# Altium PCB PCB2.PcbDoc
Units mm, origin at the board's own origin, x right, y up, seen from the top; angles counter-clockwise.
Board outline 82.42 x 32.77 mm, 2 copper layers (Top Layer, Bottom Layer); 42 components, 37 nets, 162 pads, 35 vias.
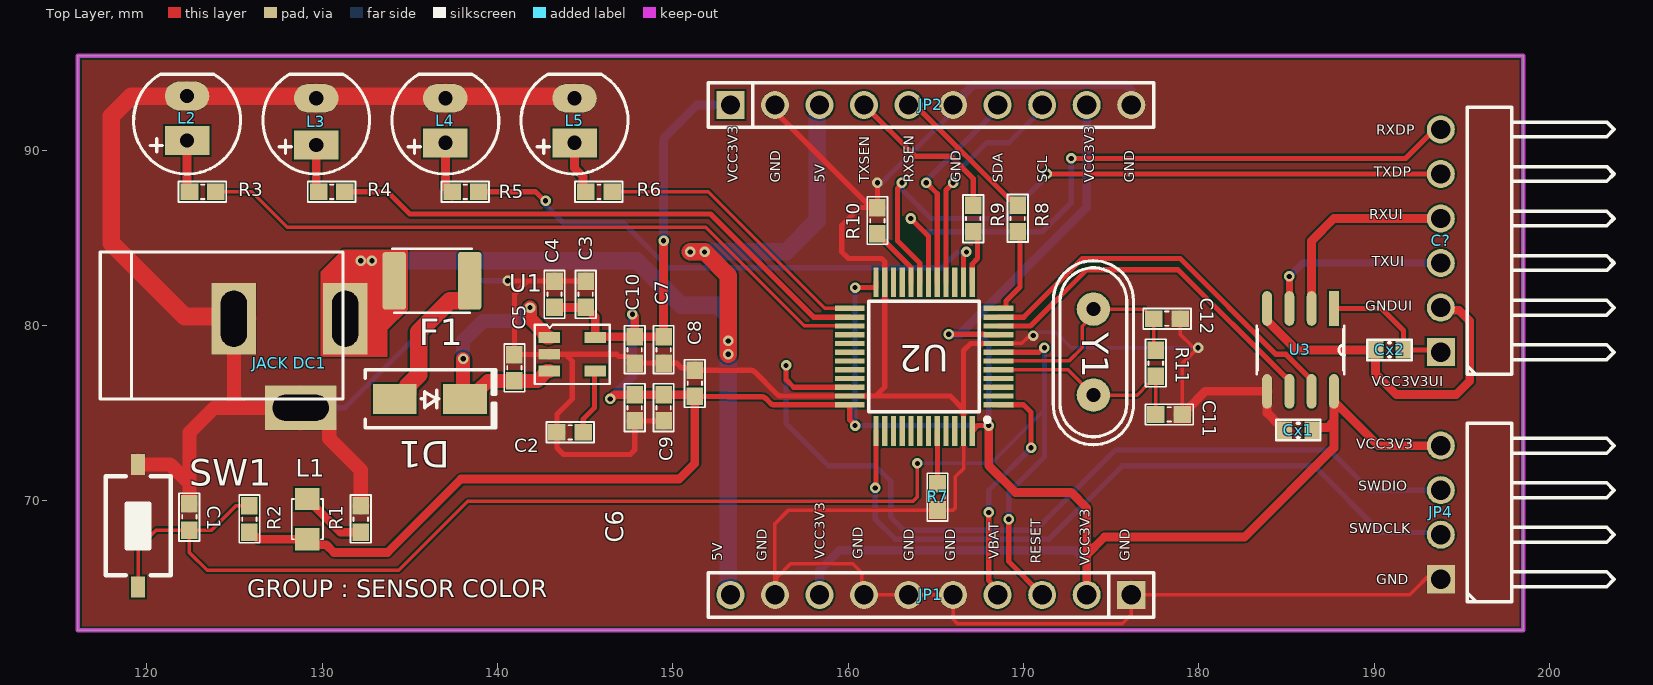
[diagram p0: Top Layer view]
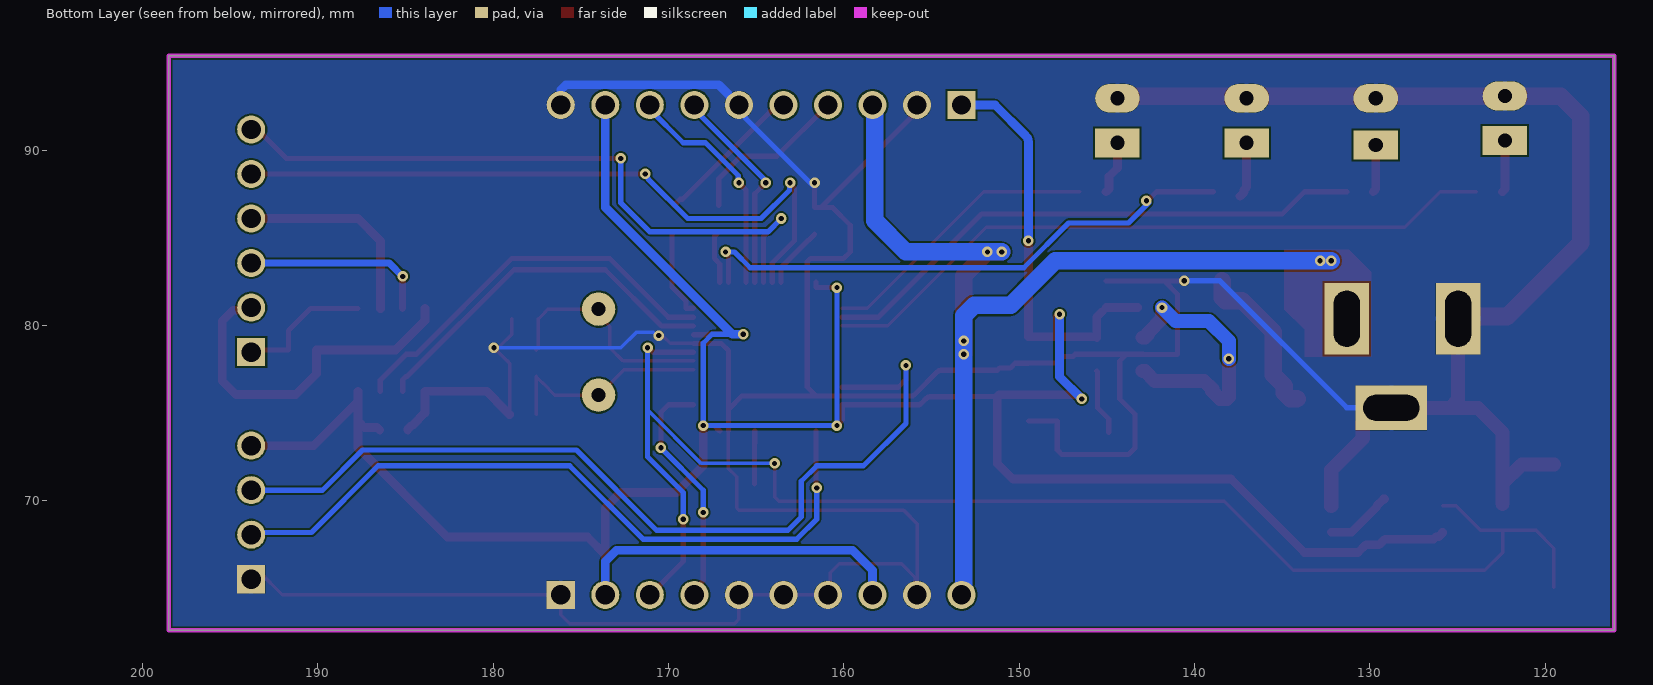
[diagram p1: Bottom Layer view, seen from below]
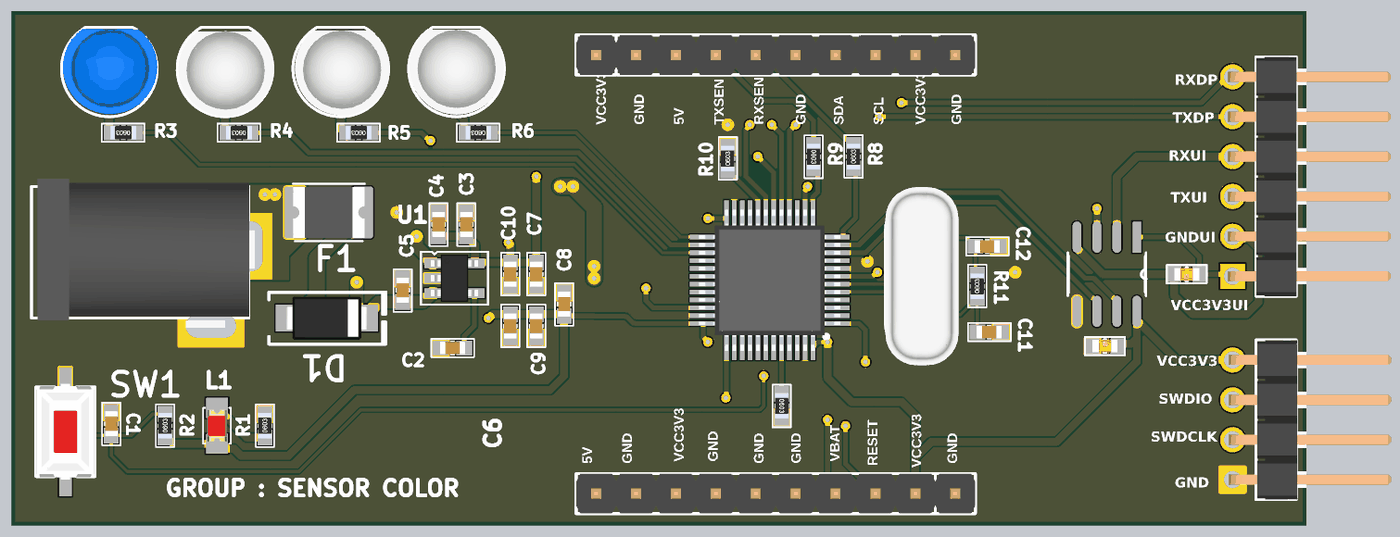
[diagram p2: 3D render of the assembled board from above, using the file's embedded part models]

## Layer stack, top to bottom
Top Solder: solder mask 0.0102, Solder Resist, Dk 3.5
Top Layer: signal copper 0.0356
Dielectric 1: dielectric 0.32, FR-4, Dk 4.8
Bottom Layer: signal copper 0.0356
Bottom Solder: solder mask 0.0102, Solder Resist, Dk 3.5

## Board outline
116.078,62.611 116.078,95.377 198.501,95.377 198.501,62.611

## Design rules (kind name [scope] priority, off if disabled: settings)
Clearance [All] p1: gap=0.1 ignorepadtopadclearanceinfootprint=FALSE
PolygonConnect [All] p1: connectstyle=Relief reliefconductorwidth=0.254 reliefentries=4 polygonreliefangle="90 Angle" airgapwidth=0
RoutingVias [All] p1: holewidth=0.3 width=0.6 viastyle="Through Hole" minholewidth=0.3 minwidth=0.6 maxholewidth=0.3 maxwidth=0.6
SolderMaskExpansion [All] p1: expansion=0.102 istentingtop=FALSE
Width [All] p1: maxlimit=1 minlimit=0.2 preferedwidth=0.5
30 further rules are at their usual default settings.

## Components (designator, comment, footprint, x,y, rotation, side; value= is the part's Value field where it differs from the comment)
C1 "105,0603" "tu 0603" 122.428,69.088 r270 top
C2 "223,0603" "tu 0603" 144.145,73.914 r0 top
C3 "106,0603" "tu 0603" 145.034,81.788 r270 top
C4 "104,0603" "tu 0603" 143.256,81.788 r270 top
C5 "105,0603" "tu 0603" 140.97,77.597 r270 top
C6 "104,0603" "tu 0603" 147.828,75.311 r90 top
C7 "104,0603" "tu 0603" 149.479,78.613 r90 top
C8 "104,0603" "tu 0603" 151.257,76.708 r270 top
C9 "104,0603" "tu 0603" 149.479,75.311 r90 top
C10 "104,0603" "tu 0603" 147.828,78.613 r90 top
C11 "20p,0603" "tu 0603" 178.308,74.93 r0 top
C12 "20p,0603" "tu 0603" 178.181,80.391 r0 top
C? "JP6" JP6-D1C 196.342,92.456 r90 top
Cx1 "104" CN-SMD-0603 185.674,74.041 r0 top value=33pF
Cx2 "104" CN-SMD-0603 190.881,78.613 r180 top value=33pF
D1 "SS14" "DIODE SMA" 136.144,75.819 r0 top
F1 "0.5A 24V" "Cau chi tu phuc hoi 2A 24V SMD1812" 136.271,82.55 r0 top
"JACK DC1" "JACK DC 5.5" "JACK DC 5.5" 128.143,77.851 r0 top value="Jac DC"
JP1 "JP 1x10 2.54" "JP 1x10 DT" 176.149,64.643 r180 top
JP2 "JP 1x10 2.54" "JP 1x10 DT" 153.289,92.583 r0 top
JP4 "JP 1x4 2.54" "JP 1x4 DC" 196.342,74.422 r90 top
L1 "LED 0805" LED-0805-Red 129.159,67.818 r90 top
L2 "LED 5mm" LED-5MM-BLUE 122.301,91.694 r90 top
L3 "LED 5mm" LED-5MM-Green 129.667,90.424 r90 top
L4 "LED 5mm" LED-5MM-Yellow 137.033,90.424 r90 top
L5 "LED 5mm" LED-5MM-RED 144.399,90.424 r90 top
R1 "510R,0603" "tro smd 0603" 132.207,68.961 r90 top
R2 "10k,0603" "tro smd 0603" 125.857,68.961 r90 top
R3 "220R,0603" "tro smd 0603" 123.19,87.63 r180 top
R4 "220R,0603" "tro smd 0603" 130.556,87.63 r180 top
R5 "220R,0603" "tro smd 0603" 138.176,87.63 r180 top
R6 "220R,0603" "tro smd 0603" 145.796,87.63 r180 top
R7 "10k,0603" "tro smd 0603" 165.1,70.231 r270 top
R8 "220R,0603" "tro smd 0603" 169.672,86.106 r90 top
R9 "220R,0603" "tro smd 0603" 167.132,86.106 r270 top
R10 "10k,0603" "tro smd 0603" 161.671,85.979 r90 top
R11 "1M" "tro smd 0603" 177.546,77.851 r90 top
SW1 "SW" SW1-SMD 119.507,68.58 r270 top value="SW chip 2 pin"
U1 "RT9193-33GB" SOT23-5 144.272,78.359 r270 top
U2 "STM32F103C8T6" LQFP-48_19.6_393_58X11_SMD 164.338,78.232 r180 top
U3 "ADUM1201ARZ" SOIC127P600X175-8N 185.801,78.613 r270 top
Y1 "8Mhz" "Thach Anh 2 chan cam" 173.99,78.486 r90 top value=4Mhz

## Footprints (in the part's own frame and the unit in brackets; to place one, negate y for a bottom-side part, rotate by r counter-clockwise, add the part's x,y. Pads: shape width x height; smd on the part's side, far side on the other; paste and mask are expansions set on the pad)
"Cau chi tu phuc hoi 2A 24V SMD1812" [mm]
  rrect25% 1.34x3.29 smd: 1(-2.15,0) 2(2.15,0)
  silkscreen extent -2.28,-1.83 2.28,1.83, body extent -2.27,-1.62 2.28,1.62, height 1.25
CN-SMD-0603 [mm]
  rect 0.9x1 smd: 1(-0.8,0) 2(0.8,0)
  silkscreen extent -1.27,-0.58 1.27,0.58, body extent -0.8,-0.4 0.8,0.4, height 0.3
"DIODE SMA" [mm] "SMA"
  rect 2.5x1.7 smd: 1(-2,0) 2(2,0)
  silkscreen extent -3.68,-1.65 3.75,1.65, body extent -2.6,-1.37 2.6,1.37, height 2.4
"JACK DC 5.5" [mm] "Jac DC input"
  rect 2.54x4.064 hole 1.5 slot 3.2 at 90 deg: 1(3.175,2.54) 2(-3.175,2.54)
  rect 4.064x2.54 hole 1.5 slot 3.2 at 0 deg: 3(0.635,-2.54)
  silkscreen extent -10.79,-2.03 3.05,6.35, body extent -10.42,-2.67 3.4,6.84, height 11.02
JP6-D1C [mm] "6 pins, 1 row, right angled, gold plating"
  rect 1.6x1.6 hole 1.1: 1(-13.97,2.54)
  round 1.6 hole 1.1: 2(-11.43,2.54) 3(-8.89,2.54) 4(-6.35,2.54) 5(-3.81,2.54) 6(-1.27,2.54)
  silkscreen extent -15.24,-7.34 0,1.04, body extent -15.24,-7.52 0,2.84, height 2.54
"JP 1x4 DC" [mm] "4 pins, 1 row, right angled, gold plating"
  rect 1.6x1.6 hole 1.1: 1(-8.89,2.54)
  round 1.6 hole 1.1: 2(-6.35,2.54) 3(-3.81,2.54) 4(-1.27,2.54)
  silkscreen extent -10.16,-7.34 0,1.04, body extent -10.16,-7.57 0,2.79, height 2.54
"JP 1x10 DT" [mm] "10 pins, 1 row, straight, gold plating"
  rect 1.6x1.6 hole 1.1: 1(0,0)
  round 1.6 hole 1.1: 2(2.54,0) 3(5.08,0) 4(7.62,0) 5(10.16,0) 6(12.7,0) 7(15.24,0) 8(17.78,0) 9(20.32,0) 10(22.86,0)
  silkscreen extent -1.27,-1.27 24.13,1.27, body extent -1.27,-1.27 24.13,1.27, height 8.54
LED-5MM-BLUE [mil] "LED 2 PIN, 5 ly , Only colour, pin to pin 110mil"
  rect 65x100 hole 32: 1(-45,0)
  oval 65x100 hole 32: 2(55,0)
  silkscreen extent -120,-120 104,120, body extent -113,-120 100,117, height 339
LED-5MM-Green [mil] "LED 2 PIN, 5 ly , Only colour,pin to pin 100mil"
  rect 65x100 hole 32: 1(-5,0)
  oval 65x100 hole 32: 2(100,0)
  silkscreen extent -70,-120 154,120, body extent -69,-120 145,117, height 339
LED-5MM-RED [mil] "LED 2 PIN, 5 ly , Only colour,pin to pin 100mil"
  rect 65x100 hole 32: 1(0,0)
  oval 65x100 hole 32: 2(100,0)
  silkscreen extent -70,-120 154,120, body extent -65,-119 149,118, height 339
LED-5MM-Yellow [mil] "LED 2 PIN, 5 ly , Only colour,pin to pin 100mil"
  rect 65x100 hole 32: 1(0,0)
  oval 65x100 hole 32: 2(100,0)
  silkscreen extent -70,-120 154,120, body extent -67,-122 147,115, height 339
LED-0805-Red [mil]
  rect 50x55 smd: 1(0,0) 2(90,0)
  silkscreen extent 0,-35 90,35, body extent 5,-25 85,25, height 43
LQFP-48_19.6_393_58X11_SMD [mm] "48LQFP"
  rect 1.7x0.3 smd mask+0.076: 1(-4.238,2.75) 2(-4.238,2.25) 3(-4.238,1.75) 4(-4.238,1.25) 5(-4.238,0.75) 6(-4.238,0.25) 7(-4.238,-0.25) 8(-4.238,-0.75) 9(-4.238,-1.25) 10(-4.238,-1.75) 11(-4.238,-2.25) 12(-4.238,-2.75) 25(4.238,-2.75) 26(4.238,-2.25) 27(4.238,-1.75) 28(4.238,-1.25) 29(4.238,-0.75) 30(4.238,-0.25) 31(4.238,0.25) 32(4.238,0.75) 33(4.238,1.25) 34(4.238,1.75) 35(4.238,2.25) 36(4.238,2.75)
  rect 0.3x1.7 smd mask+0.076: 13(-2.75,-4.238) 14(-2.25,-4.238) 15(-1.75,-4.238) 16(-1.25,-4.238) 17(-0.75,-4.238) 18(-0.25,-4.238) 19(0.25,-4.238) 20(0.75,-4.238) 21(1.25,-4.238) 22(1.75,-4.238) 23(2.25,-4.238) 24(2.75,-4.238) 37(2.75,4.238) 38(2.25,4.238) 39(1.75,4.238) 40(1.25,4.238) 41(0.75,4.238) 42(0.25,4.238) 43(-0.25,4.238) 44(-0.75,4.238) 45(-1.25,4.238) 46(-1.75,4.238) 47(-2.25,4.238) 48(-2.75,4.238)
  silkscreen extent -3.73,-3.15 3.15,3.72, body extent -4.5,-4.5 4.5,4.5, height 1.7
SOIC127P600X175-8N [mil]
  rect 78x22 smd: 1(-93,75)
  oval 78x22 smd: 2(-93,25) 3(-93,-25) 4(-93,-75) 5(93,-75) 6(93,-25) 7(93,25) 8(93,75)
  silkscreen extent -54,-98 54,99
SOT23-5 [mm] "CASE: SOT"
  rect 0.62x1.22 smd mask+0.076: 1(-0.953,-1.31) 2(-0.003,-1.31) 3(0.947,-1.31) 4(0.952,1.31) 5(-0.953,1.31)
  silkscreen extent -1.69,-2.14 1.69,2.14, body extent -1.5,-1.5 1.5,1.5, height 1.41
SW1-SMD [mm]
  rect 1.2x0.8 smd: 1(-3.5,0) 2(3.5,0)
  silkscreen extent -2.82,-1.85 2.82,1.85, body extent -3.05,-1.85 3.05,1.85, height 2.5
"Thach Anh 2 chan cam" [mm]
  round 1.905 hole 0.8: 1(-2.45,0) 2(2.45,0)
  silkscreen extent -5.28,-2.29 5.21,2.29, body extent -5.68,-2.36 5.68,2.29, height 3.5
"tro smd 0603" [mm] "Chip Capacitor, 2-Leads, Body 1,60x0,80mm, IPC Medium Density"
  rect 1x0.95 smd mask+0.076: 1(-0.75,0) 2(0.75,0)
  silkscreen extent -1.35,-0.58 1.37,0.58, body extent -0.82,-0.42 0.82,0.43, height 0.44
"tu 0603" [mm] "Chip Capacitor, 2-Leads, Body 1,60x0,80mm, IPC Medium Density"
  rect 1x0.95 smd mask+0.076: 1(-0.75,0) 2(0.75,0)
  silkscreen extent -1.35,-0.58 1.37,0.58, body extent -0.8,-0.4 0.8,0.4, height 0.9

## Part data
C1 C5: library part "Tu 0603 105 16V 20%", "Dán", Chung_Loai=Dán, Don_Vi=Con, Ma_Hang=MH004574, So_Chan=2, Ten_Linh_Kien="Tụ 0603 105-1uF 20% 16V"
C2 C11 C12: library part "Tu 0603 22pF 50V 10%", "Dán", Chung_Loai=Dán, Don_Vi=Con, Ma_Hang=MH004570, So_Chan=2, Ten_Linh_Kien="Tụ 0603 22pF 50V 10%"
C3: library part "Tu 0603 106 16V 20%", "Dán", Chung_Loai=Dán, Don_Vi=Con, Ma_Hang=MH004848, So_Chan=2, Ten_Linh_Kien="Tụ 0603-10uF 20% 16V"
C4 C6 C7 C8 C9 C10: library part "Tu 0603 104 50V 10%", "Dán", Chung_Loai=Dán, Don_Vi=Con, Ma_Hang=MH004568, So_Chan=2, Ten_Linh_Kien="Tụ 0603 104-100nF 10% 50V"
C?: "WR-PHD 2.54 mm Angled Socket Header", Manufacturer="W¨¹rth Elektronik eiSos GmbH", partNo=613006143121, ComponentLink1 Description=Manufacturer, ComponentLink1URL=http://www.we-online.com, ComponentLink2 Description=Datasheet, ComponentLink2URL=http://katalog.we-online.de/em/datasheet/6130xx143121.pdf, Created by="Karrer Zheng", Created Date="29 March 2013", NoPins=06
Cx1 Cx2: library part CN
D1: library part "Diode SS14 ( 1N5819)", "Dán", Chung_Loai=Dán, Don_Vi=Con, Ma_Hang=MH002211, Ten_Linh_Kien="Diode SS14 DO214 Schottky 1A 40V ( 1N5819 DO214)"
F1: library part "Cau chi tu phuc hoi 2A 24V SMD1812", "2A 24V SMD1812", Ma_Hang=MH010033, Ten="Cầu Chì Tự Phục Hồi 2A 24V SMD1812"
JP1 JP2: library part "JP 1x10 2.54 Duc Thang", "Cắm", Chung_Loai=Cắm, Don_Vi=Con, Ma_Hang=MH000903, Ten_Linh_Kien="Jump Đơn Đực 2.54MM 1x40P Thẳng 11MM"
JP4: library part "JP 1x4 2.54 Duc Cong", "Cắm", Chung_Loai=Cắm, Don_Vi=Con, Ma_Hang=MH000904, Ten_Linh_Kien="Jump Đơn Đực 2.54MM 1x40P Cong Đứng"
L1: library part "LED 0805 Do", "Dán", Chung_Loai=Dán, Don_Vi=Con, Ma_Hang=MH000897, Ten_Linh_Kien="LED 0805 Màu Đỏ (Red)"
L2: library part "LED 5mm Xanh Duong", "Cắm", Chung_Loai=Cắm, Don_Vi=Con, Ma_Hang=MH008987, Ten_Linh_Kien="Led 5MM Xanh Dương Đục (1000c)"
L3: library part "LED 5mm Xanh La", "Cắm", Chung_Loai=Cắm, Don_Vi=Con, Ma_Hang=MH008969, Ten_Linh_Kien="LED 5MM Phủ Xanh (1000c)"
L4: library part "LED 5mm Vang", "Cắm", Chung_Loai=Cắm, Don_Vi=Con, Ma_Hang=MH008968, Ten_Linh_Kien="Led 5MM Phủ Vàng (1000c)"
L5: library part "LED 5mm Do", "Cắm", Chung_Loai=Cắm, Don_Vi=Con, Ma_Hang=MH008967, Ten_Linh_Kien="Led 5MM Phủ Đỏ (1000c)"
R1: library part "Tro 0603 5% 510R", "Dán", Chung_Loai=Dán, Don_Vi=Con, Ma_Hang=MH007667, So_Chan=2, Ten_Linh_Kien="Trở 0603 5% 510R"
R2 R7 R10: library part "Tro 0603 1% 10k", "Dán", Chung_Loai=Dán, Don_Vi=Con, Ma_Hang=MH006333, So_Chan=2, Ten_Linh_Kien="Trở 0603 1% 10k"
R3 R4 R5 R6 R8 R9: library part "Tro 0603 5% 220R", "Dán", Chung_Loai=Dán, Don_Vi=Con, Ma_Hang=MH006322, So_Chan=2, Ten_Linh_Kien="Trở 0603 5% 220R"
R11: library part "Tro 0603 5% 1M", "Dán", Chung_Loai=Dán, Don_Vi=Con, Ma_Hang=MH006909, So_Chan=2, Ten_Linh_Kien="Trở 0603 5% 1M"
SW1: library part SW2, "Switch button 2 pin"
U1: library part REG_5.5V-3.3V-0.3A-1W-SOT-23-5, "Linear Voltage Regulator IC 1 Output 300mA SOT-23-5", Alternate Part Number-1=NA, Case/Package=SOT-23-5, Manufacturer="Richtek USA Inc.", Supplier Part Number-1=C15651, Manufacturer Part Number=RT9193-33GB, Supplier-1=LCSC
U2: library part IC_STM32F103C8T6, "ARM® Cortex®-M3 STM32F1 Microcontroller IC 32-Bit 72MHz 64KB (64K x 8) FLASH 48-LQFP (7x7)", Alternate Part Number-1=NA, Case/Package=LQFP48, Manufacturer=STMicroelectronics, Manufacturer Part Number=STM32F103C8T6, Supplier Part Number-1=STM32F103C8T6, Supplier-1=LCSC
U3: "Digital Isolator CMOS 2-CH 1Mbps 8-Pin SOIC N Tube", Package=None, Check_prices=https://www.snapeda.com/parts/ADUM1201ARZ%20./Analog+Devices/view-part/?ref=eda, MF="Analog Devices", MP="ADUM1201ARZ .", SnapEDA_Link=https://www.snapeda.com/parts/ADUM1201ARZ%20./Analog+Devices/view-part/?ref=snap
Y1: library part "Thach Anh 2 chan Cam", "Crystal For all Crystal 2pin."

## Via types
v1: diameter 0.6, hole 0.3, Top Layer to Bottom Layer, 35 vias

## Nets (pads, with @x,y where several pads share a name; then routed paths per layer and width w, separated by ;. In a path a pad name is that pad's centre, name@x,y a point inside that pad or via, vN(x,y) a via of type N, cw(c..) or ccw(c..) an arc to the next point about the centre after c; other vN are vias at no path point)
5V: "JACK DC1.1" F1.1 JP1.10 JP2.3 | length 63.7
  Top Layer w1: 131.318,80.391 131.318,82.804 v1(132.207,83.693) ; v1(151.003,84.201) v1(151.814,84.201) 153.162,82.853 v1(153.162,78.359)
  Bottom Layer w1: v1(132.207,83.693) v1(132.842,83.693) 147.955,83.693 150.495,81.153 152.576,81.153 153.162,80.567 v1(153.162,78.359) 153.162,65.194 153.174,65.182 153.174,64.758 JP1.10 ; v1(151.003,84.201) 156.464,84.201 158.254,85.991 158.254,92.468 JP2.3
  other v1: 153.162,79.121
BOOT0: R7.1 U2.44 | length 3
  Top Layer w0.3: U2.44 165.088,73.294 165.1,73.282 R7.1
BOOT1: R10.1 U2.20 | length 3.6
  Top Layer w0.3: R10.1 161.671,85.204 161.996,84.879 162.021,84.879 163.33,83.57 163.342,83.57 163.588,83.324 U2.20
GND: "JACK DC1.2" "JACK DC1.3" C1.1 C2.1 C3.1 C4.1 C5.1 C6.1 C7.1 C8.1 C9.1 C10.1 C11.2 C12.2 Cx1.1 JP1.1 JP1.5 JP1.6 JP1.7 JP1.9 JP2.2 JP2.6 JP2.10 JP4.1 L2.2 L3.2 L4.2 L5.2 R1.2 R7.2 R10.2 SW1.1 U1.2 U2.8 U2.23 U2.35 U2.47 U3.5 | length 273.6
  Top Layer w0.2: U2.47 166.588,71.846 166.116,71.374 166.116,69.598 165.999,69.481 R7.2 156.603,69.481 155.829,68.707 155.829,65.626 155.829,64.737 JP1.9 155.923,64.737 155.923,65.626 156.718,66.421 160.274,66.421 160.782,65.913 160.782,64.77 JP1.7 JP1.6 JP1.5 165.989,63.246 166.243,62.992 175.641,62.992 176.149,63.5 JP1.1 192.024,64.643 193.327,65.946 193.54,65.946 193.802,66.208 JP4.1 ; U2.8 169.914,78.982 170.287,79.355 170.484,79.355 v1(170.561,79.432) ; C12.2 178.931,79.514 179.628,78.817 ; C11.2 179.07,74.942 179.07,77.861 179.187,77.978 179.197,77.978 v1(179.959,78.74)
  Top Layer w0.3: v1(140.589,82.55) 140.601,82.538 141.72,82.538 ; C3.1 C4.1 141.72,82.538 ; C9.1 C6.1 147.828,72.898 147.574,72.644 143.764,72.644 143.395,73.013 C2.1 143.395,74.942 144.272,75.819 144.272,77.978 143.888,78.362 ; JP2.2 155.829,92.231 156.222,91.838 156.222,91.809 R10.2@161.302,86.729 ; v1(161.671,88.138) R10.2 R10.2@161.302,86.729 ; U2.47 166.588,75.22 ; U2.8 166.993,78.982 166.588,78.577 166.588,75.22 ; 141.72,82.538 140.97,81.788 C5.1 142.947,78.347 U1.2 143.888,78.362 ; 143.888,78.362 146.809,78.362 146.939,78.232 147.459,78.232 147.478,78.213 147.503,78.213 147.828,77.888 C10.1 C7.1 149.491,77.851 150.241,77.851 150.508,77.584 151.131,77.584 C8.1 154.447,77.458 cw(c154.447,77.158) 154.658,77.371 155.96,76.069 ccw(c156.171,76.282) 156.17,75.982 U2.35 161.58,75.982 ; R10.2@161.302,86.729 160.643,86.729 159.639,85.725 159.639,84.201 160.02,83.82 161.912,83.82 162.088,83.644 U2.23 162.088,76.49 161.58,75.982 ; 161.58,75.982 165.826,75.982 166.588,75.22
  Top Layer w0.5: C11.2 179.083,74.93 179.308,75.155 179.308,75.18 180.379,76.251 U3.5 183.896,75.019 184.624,74.291 184.674,74.291 184.874,74.091 Cx1.1
  Top Layer w0.8: SW1.1 121.341,72.08 122.428,70.993 ; C1.1 122.428,70.993 ; 124.968,80.391 124.968,75.78 125.437,75.311 ; R1.2 132.207,71.755 130.41,73.552 130.41,74.441 129.54,75.311 128.778,75.311 125.437,75.311 ; 122.428,70.993 122.428,73.914 123.825,75.311 125.437,75.311
  Top Layer w1: 124.968,80.391 124.841,80.518 122.174,80.518 117.983,84.709 117.983,91.948 119.126,93.091 L2.2 143.651,93.091 143.778,92.964 L5.2
  Bottom Layer w0.2: v1(170.561,79.432) 170.669,79.432 170.866,79.629 171.831,79.629 172.72,78.74 v1(179.959,78.74)
  Bottom Layer w0.3: 128.778,75.311 131.318,75.311 138.557,82.55 v1(140.589,82.55) ; v1@161.793,88.006 165.596,91.809 165.596,91.838 165.989,92.231 JP2.6
  Bottom Layer w0.5: JP2.6 167.139,93.733 175.849,93.733 176.149,93.433 JP2.10
GNDUI: C?.2 Cx2.2 U3.4 | length 20.5
  Top Layer w0.5: U3.4 183.896,80.28 185.563,78.613 Cx2.2 190.081,77.254 191.262,76.073 194.691,76.073 195.453,76.835 195.453,80.264 194.843,80.874 193.954,80.874 C?.2
NetC2_2: C2.2 U1.4 | length 3.8
  Top Layer w0.3: C2.2 144.895,74.664 145.542,75.311 145.542,77.367 U1.4
NetC5_2: C5.2 D1.2 U1.1 U1.3 | length 15.7
  Top Layer w0.8: v1(138.049,78.105) 138.049,75.914 D1.2 138.544,75.819 138.994,76.269 138.994,76.378 139.463,76.847 C5.2 142.283,76.847 142.752,77.316 142.752,77.322 142.842,77.412 U1.3 ; v1(141.859,81.026) 141.859,80.391 142.662,79.588 142.662,79.492 142.842,79.312 U1.1
  Bottom Layer w0.8: v1(138.049,78.105) 138.049,79.121 139.192,80.264 141.097,80.264 v1(141.859,81.026)
NetD1_1: D1.1 F1.2 | length 9.3
  Top Layer w1: D1.1 134.544,75.819 134.894,76.169 134.894,76.569 135.509,77.184 135.509,79.638 137.276,81.405 138.251,81.405 138.421,81.575 F1.2
NetL1_2: L1.2 R1.1 | length 3.9
  Top Layer w0.5: L1.2 129.222,70.104 129.608,69.719 129.608,69.655 131.052,68.211 R1.1
NetL2_1: L2.1 R3.2 | length 3
  Top Layer w0.5: L2.1 122.301,87.769 R3.2
NetL3_1: L3.1 R4.2 | length 2.7
  Top Layer w0.5: L3.1 129.667,87.769 R4.2
NetL4_1: L4.1 R5.2 | length 3.2
  Top Layer w0.5: L4.1 137.033,87.894 137.176,87.751 137.176,87.601 137.401,87.376 R5.2@137.426,87.376
NetL5_1: L5.1 R6.2 | length 3.1
  Top Layer w0.5: L5.1 144.399,88.984 144.882,88.501 144.882,87.794 R6.2
NetR8_1: R8.1 U2.12 | length 5.2
  Top Layer w0.3: U2.12 169,80.982 169,81.406 169.799,82.205 169.799,85.229 R8.1
NetR9_2: R9.2 U2.13 | length 3.1
  Top Layer w0.3: U2.13 167.088,83.258 167.08,83.266 167.08,83.514 167.386,83.82 167.386,85.102 R9.2
OSCIN: C11.1 R11.1 U2.5 Y1.1 | length 12.2
  Top Layer w0.2: U2.5 172.544,77.482 Y1.1 176.481,76.036 177.146,76.701 177.171,76.701 R11.1@177.546,77.076 ; R11.1 R11.1@177.546,77.076 ; C11.1 177.546,74.942 R11.1@177.546,77.076
OSCOUT: C12.1 R11.2 U2.6 Y1.2 | length 13.1
  Top Layer w0.2: U2.6 172.597,77.982 173.355,78.74 173.355,79.966 173.99,80.601 Y1.2 176.886,80.936 177.031,80.791 177.031,80.766 177.406,80.391 C12.1 177.431,78.716 R11.2
PA4: R5.1 U2.14 | length 32
  Top Layer w0.3: R5.1 142.168,87.63 142.676,87.122 v1(142.748,87.122) ; U2.14 166.588,83.957 166.751,84.12 v1(166.751,84.201)
  Bottom Layer w0.3: v1(142.748,87.122) 142.621,86.995 143.764,85.852 147.193,85.852 149.745,83.3 165.342,83.3 166.243,84.201 v1(166.751,84.201)
PB12: R6.1 U2.25 | length 16.3
  Top Layer w0.2: R6.1 152.019,87.63 158.667,80.982 U2.25
PB13: R4.1 U2.26 | length 31.8
  Top Layer w0.3: R4.1 133.731,87.63 135.001,86.36 152.146,86.36 158.024,80.482 U2.26
PB14: R3.1 U2.27 | length 39.3
  Top Layer w0.2: R3.1 125.984,87.63 128.016,85.598 151.892,85.598 157.508,79.982 U2.27
RESET: C1.2 JP1.3 R2.2 SW1.2 U2.7 | length 83.4
  Top Layer w0.2: SW1.2 119.507,67.31 120.535,68.338 C1.2 ; R2.2 125.083,69.711 123.71,68.338 C1.2 ; v1(163.957,72.136) 163.957,70.231 163.703,69.977 138.303,69.977 134.366,66.04 123.444,66.04 122.428,67.056 C1.2
  Top Layer w0.3: U2.7 170.87,78.482 171.128,78.74 v1(171.196,78.74) ; v1(169.164,68.961) 169.164,66.548 JP1.3
  Bottom Layer w0.2: v1(163.957,72.136) 168.148,72.136 171.196,75.184
  Bottom Layer w0.3: v1(169.164,68.961) 169.164,70.485 171.196,72.517 171.196,75.184 v1(171.196,78.74)
RXDP: C?.6 U2.18 | length 38.5
  Top Layer w0.3: v1(163.576,86.106) 164.588,85.094 U2.18 ; v1(172.72,89.535) 191.799,89.535 193.45,91.186 C?.6
  Bottom Layer w0.3: v1(163.576,86.106) 164.338,85.344 171.069,85.344 172.72,86.995 v1(172.72,89.535)
RXSEN: JP2.5 R8.2 | length 8.6
  Top Layer w0.3: JP2.5 163.801,92.583 164.194,92.19 164.223,92.19 169.207,87.206 169.347,87.206 169.672,86.881 R8.2
RXSOFT: U2.10 U3.6 | length 21.2
  Top Layer w0.3: U2.10 170.406,79.982 173.609,83.185 178.816,83.185 184.91,77.091 184.967,77.091 185.166,76.892 U3.6
RXUI: C?.4 U3.2 | length 11.8
  Top Layer w0.5: U3.2 186.436,84.836 187.706,86.106 C?.4
SCL: JP2.8 U2.16 | length 13.1
  Top Layer w0.3: U2.16 165.588,87.737 v1(165.989,88.138)
  Bottom Layer w0.3: v1(165.989,88.138) 166.029,88.178 166.029,88.559 167.894,90.424 169.164,90.424 171.069,92.329 JP2.8
SDA: JP2.7 U2.17 | length 12.1
  Top Layer w0.3: v1(164.465,88.138) 165.088,87.515 U2.17
  Bottom Layer w0.3: v1(164.465,88.138) 164.522,88.195 164.522,88.322 168.529,92.329 JP2.7
SWDCLK: JP4.2 U2.37 | length 41.2
  Top Layer w0.3: v1(161.544,70.739) 161.588,70.783 U2.37
  Bottom Layer w0.3: v1(161.544,70.739) 161.544,68.961 162.687,67.818 171.45,67.818 175.641,72.009 186.563,72.009 190.373,68.199 JP4.2@193.924,68.199
SWDIO: JP4.3 U2.34 | length 51.9
  Top Layer w0.3: v1(156.464,77.724) 156.464,76.916 156.898,76.482 U2.34
  Bottom Layer w0.3: v1(156.464,77.724) 156.464,74.422 158.877,72.009 161.544,72.009 162.433,71.12 162.433,69.088 163.195,68.326 170.688,68.326 175.26,72.898 187.452,72.898 189.738,70.612 JP4.3@193.929,70.612
TXDP: C?.5 U2.19 | length 39.2
  Top Layer w0.3: v1(163.068,88.138) 163.068,88.066 162.814,87.812 162.814,84.836 164.088,83.562 U2.19 ; v1(171.323,88.646) 173.355,88.646 C?.5
  Bottom Layer w0.3: v1(163.068,88.138) 163.108,88.098 163.108,87.717 164.719,86.106 168.91,86.106 171.173,88.369 171.173,88.415 171.323,88.565 v1(171.323,88.646)
TXSEN: JP2.4 R9.1 | length 9.5
  Top Layer w0.3: JP2.4 163.83,89.662 165.862,89.662 167.132,88.392 R9.1
TXSOFT: U2.11 U3.7 | length 22.8
  Top Layer w0.3: U2.11 170.017,80.482 173.355,83.82 178.943,83.82 184.404,78.359 184.969,78.359 186.237,77.091 186.436,76.892 U3.7
TXUI: C?.3 U3.3 | length 10.8
  Top Layer w0.4: U3.3 v1(185.166,82.804)
  Bottom Layer w0.4: v1(185.166,82.804) 185.928,83.566 C?.3
VBAT: JP1.4 U2.1 | length 13.7
  Top Layer w0.3: v1(168.021,69.342) 168.021,65.469 168.529,64.961 JP1.4 ; U2.1 170.009,75.482 170.179,75.312 170.434,75.057 v1(170.434,73.025)
  Bottom Layer w0.3: v1(168.021,69.342) 168.021,70.612 v1(170.434,73.025)
VCC3V3: C3.2 C4.2 C6.2 C7.2 C8.2 C9.2 C10.2 Cx1.2 JP1.2 JP1.8 JP2.1 JP2.9 JP4.4 L1.1 R2.1 U1.5 U2.9 U2.24 U2.36 U2.48 U3.8 | length 182.8
  Top Layer w0.3: C8.2 153.15,75.958 153.162,75.946 155.07,75.946 cw(c155.07,75.646) 155.281,75.859 155.571,75.569 ccw(c155.782,75.782) 155.781,75.482 U2.36 160.1,74.621 160.401,74.32 v1(160.401,74.295) ; v1(160.401,82.169) 161.588,82.169 U2.24 ; v1(165.735,79.502) 167.768,79.502 167.788,79.482 U2.9 ; U2.48 167.389,74.295 v1(168.021,74.295)
  Top Layer w0.5: R2.1 125.857,68.186 126.082,67.961 126.232,67.961 126.375,67.818 L1.1 129.475,67.502 130.237,67.502 130.683,67.056 133.731,67.056 137.922,71.247 150.368,71.247 151.257,72.136 C8.2 151.154,76.061 C9.2 C6.2 146.7,76.061 146.458,75.819 v1(146.431,75.819) ; C4.2 C3.2 ; C3.2@145.284,80.788 145.582,80.49 U1.5 145.633,79.363 C10.2 ; v1(147.701,80.645) 147.828,80.518 C10.2 ; v1(149.479,84.836) C7.2 C10.2 ; v1(168.021,74.295) 168.021,72.009 169.545,70.485 172.72,70.485 173.609,69.596 173.609,66.929 ; JP1.2 173.609,66.929 ; Cx1.2 186.617,74.184 187.341,74.184 187.706,74.549 ; U3.8 U3.8@187.706,75.556 ; JP4.4@193.712,73.152 190.248,73.152 187.872,75.528 187.733,75.528 U3.8@187.706,75.556 ; 173.609,66.929 174.625,67.945 182.626,67.945 187.706,73.025 187.706,74.549 ; 187.706,74.549 U3.8@187.706,75.556
  Bottom Layer w0.3: v1(160.401,82.169) v1(160.401,74.295) v1(168.021,74.295) 168.021,78.994 167.513,79.502 166.37,79.502
  Bottom Layer w0.5: v1(146.431,75.819) 147.701,77.089 v1(147.701,80.645) ; v1(149.479,84.836) 149.479,90.471 cw(c149.979,90.471) 149.625,90.824 151.384,92.583 JP2.1 ; JP1.8 158.369,66.04 159.512,67.183 172.974,67.183 173.609,66.548 JP1.2 ; v1(165.735,79.502) 166.37,79.502 173.609,86.741 JP2.9 ; JP4.4@193.65,73 JP4.4
VCC3V3UI: C?.1 Cx2.1 U3.1 | length 7.8
  Top Layer w0.3: U3.1 190.424,80.975 191.681,79.718 Cx2.1 193.675,78.613 C?.1
pads on no net: U2.2 U2.3 U2.4 U2.15 U2.21 U2.22 U2.28 U2.29 U2.30 U2.31 U2.32 U2.33 U2.38 U2.39 U2.40 U2.41 U2.42 U2.43 U2.45 U2.46

## Polygon pours and split planes (outlines as drawn)
GND on Top Layer "NONET_L02_P-001" (solid, remove dead copper, pour order 0): 116.078,95.377 198.501,95.377 198.501,62.611 116.078,62.611
GND on Bottom Layer "NONET_L02_P-001" (solid, remove dead copper, pour order 1): 116.078,95.377 198.501,95.377 198.501,62.611 116.078,62.611

## Keep-outs
Keep-Out Layer:
  the board outline again, w0.254

## Other copper
Top Layer:
  region net 5V: 129.921,78.232 129.921,83.058 131.191,84.328 134.874,84.328 134.874,80.899 133.731,79.756 133.731,78.232

## Silkscreen, mask and mechanical layers (free items; w line width, h text height)
Top Overlay:
  text "RXDP" at 190.113,90.688 h1
  text "TXDP" at 189.986,88.275 h1
  text "VCC3V3" at 153.912,88.138 h1 r90
  text "GND" at 156.325,88.138 h1 r90
  text "5V" at 158.865,88.138 h1 r90
  text "TXSEN" at 161.405,88.138 h1 r90
  text "RXSEN" at 163.945,88.138 h1 r90
  text "GND" at 166.612,88.138 h1 r90
  text "SDA" at 169.025,88.136 h1 r90
  text "SCL" at 171.565,88.136 h1 r90
  text "VCC3V3" at 174.232,88.138 h1 r90
  text "GND" at 176.518,88.138 h1 r90
  text "RXUI" at 189.732,85.862 h1
  text "TXUI" at 189.859,83.195 h1
  text "GNDUI" at 189.482,80.655 h1
  text "VCC3V3UI" at 189.865,76.337 h1
  text "VCC3V3" at 188.976,72.781 h1
  text "SWDIO" at 189.096,70.368 h1
  text "SWDCLK" at 188.588,67.955 h1
  text "VCC3V3" at 158.865,66.675 h1 r90
  text "GND" at 161.024,66.675 h1 r90
  text "VBAT" at 168.783,66.675 h1 r90
  text "5V" at 153.023,66.548 h1 r90
  text "GND" at 155.563,66.548 h1 r90
  text "GND" at 163.945,66.548 h1 r90
  text "GND" at 166.311,66.558 h1 r90
  text "GND" at 176.264,66.548 h1 r90
  text "RESET" at 171.184,66.421 h1 r90
  text "VCC3V3" at 173.978,66.294 h1 r90
  text "GND" at 190.117,65.034 h1
  text "GROUP : SENSOR COLOR" at 125.73,64.516 h1